# Altium PCB 505153_1_3.PcbDoc
Units mil, origin at the board's own origin, x right, y up, seen from the top; angles counter-clockwise.
Board outline 3550 x 2525 mil, 2 copper layers (Top Layer, Bottom Layer); 26 components, 19 nets, 86 pads, 39 vias.
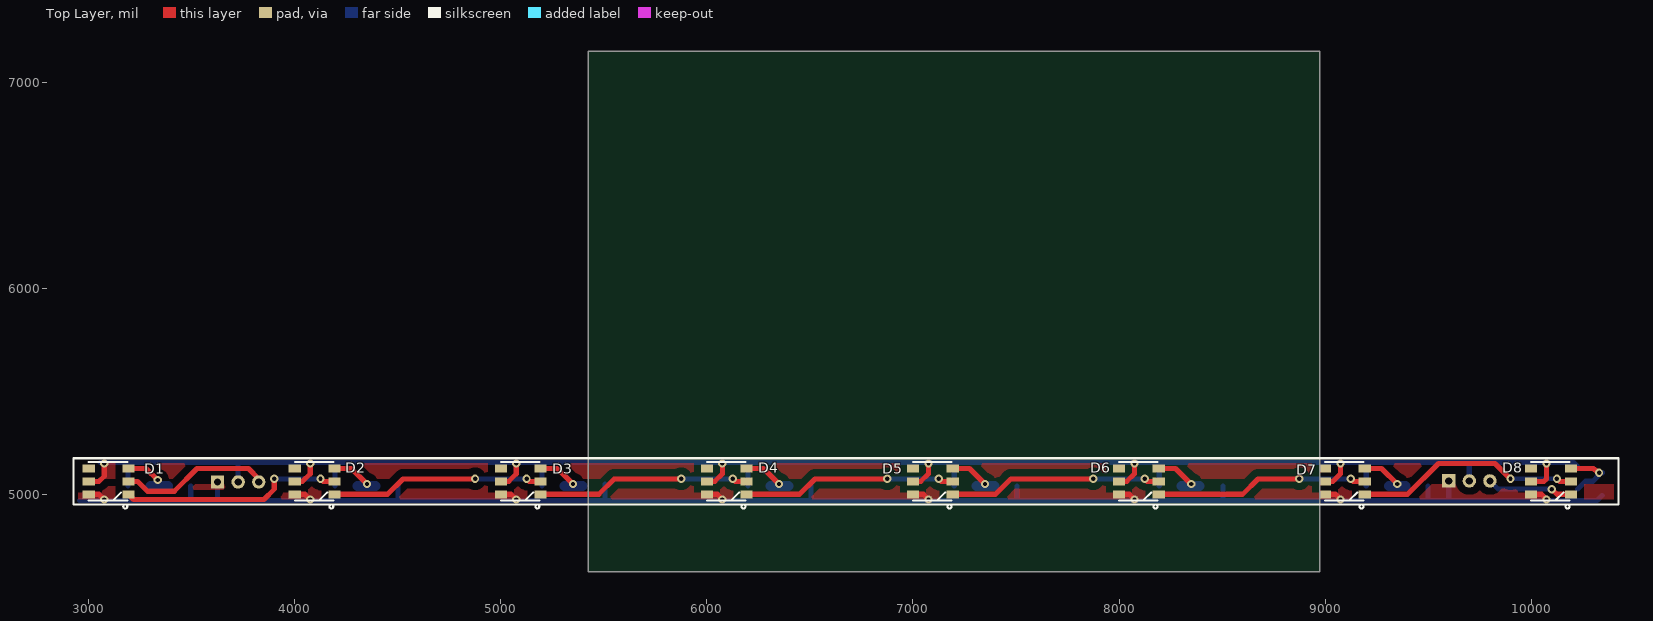
[diagram p0: Top Layer view]
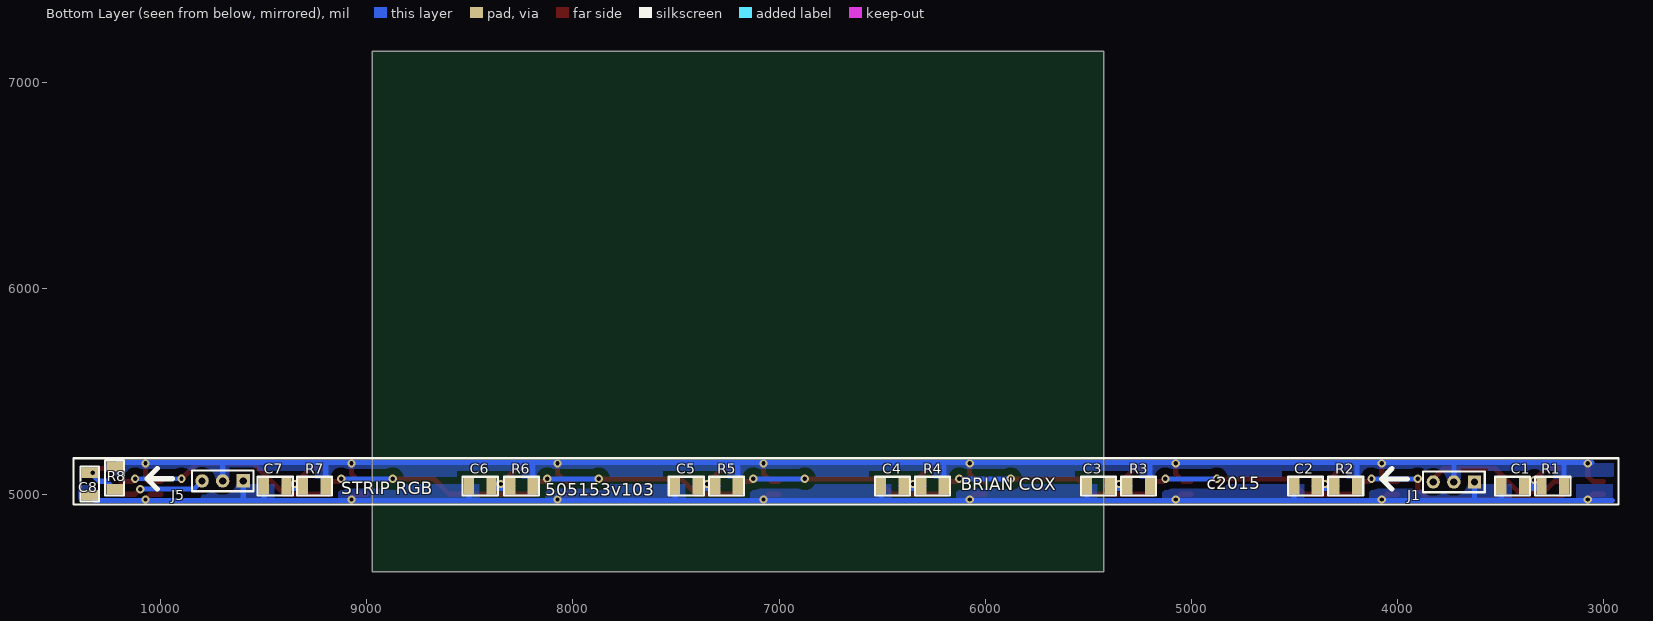
[diagram p1: Bottom Layer view, seen from below]

## Layer stack, top to bottom
Top Layer: signal copper 1.4
Dielectric: core 12.6, FR-4, Dk 4.8
Bottom Layer: signal copper 1.4

## Board outline
5425,4625 8975,4625 8975,7150 5425,7150

## Design rules (kind name [scope] priority, off if disabled: settings)
Clearance LED [(HasFootprint('LED T-1'))] p1: gap=0
Clearance POLYGON [(InPolygon)] p2: gap=35
Clearance JUMPER [(HasFootprint('JUMPER_SMT'))] p3: gap=0
Clearance [All] p4: gap=15
ComponentClearance [All] p1: gap=5 collisioncheckmode=0 verticalgap=10
HoleSize [All] p1: absolutevalues=TRUE maxlimit=126 minlimit=1 maxpercent=80.000 minpercent=20.000
PasteMaskExpansion [All] p1: expansion=-5
PlaneClearance [All] p1: clearance=35
PlaneConnect [All] p1: planeconnectstyle=Relief reliefexpansion=25 reliefentries=4 reliefconductorwidth=25 reliefairgap=25
PolygonConnect [All] p1: connectstyle=Direct reliefconductorwidth=25 reliefentries=4 polygonreliefangle="90 Angle"
RoomDefinition 505153_1_2 [InComponentClass('505153_1_2')] p1: confinementstyle=ConfineIn formatcopy=TRUE lockcomponents=FALSE outline 2150,4150 10700,4150 10700,5650 2150,5650
RoutingVias [All] p1: holewidth=20 width=41 viastyle="Through Hole" minholewidth=20 minwidth=41 maxholewidth=35 maxwidth=65
SMDNeckDown [All] p1 off: percent=75.000
SolderMaskExpansion [All] p1: expansion=4
TestPointUsage [All] p1: valid=0 allowmultiple=FALSE
Testpoint [All] p1: side=15 testpointundercomponent=TRUE minsize=40 maxsize=100 preferedsize=60 minholesize=0 maxholesize=40 preferedholesize=32 testpointgrid=1 style=1023 order=0123456789
Width [All] p1: maxlimit=250 minlimit=5 preferedwidth=25 bottomlayer_prefwidth=50 minimp=50.000000 maximp=50.000000 favimp=50.000000
Width DC [(InNet('DC*'))] p2: maxlimit=100 minlimit=15 preferedwidth=50
Width AC [(InNet('AC1') or InNet('AC2'))] p3: maxlimit=100 minlimit=15 preferedwidth=50
14 further rules are at their usual default settings.

## Components (designator, comment, footprint, x,y, rotation, side; value= is the part's Value field where it differs from the comment)
C1 "CAP_1206" SMT_1206_MOD 3440,5040 r90 bottom
C2 "CAP_1206" SMT_1206_MOD 4445,5040 r90 bottom
C3 "CAP_1206" SMT_1206_MOD 5450,5040 r90 bottom
C4 "CAP_1206" SMT_1206_MOD 6450,5040 r90 bottom
C5 "CAP_1206" SMT_1206_MOD 7450,5040 r90 bottom
C6 "CAP_1206" SMT_1206_MOD 8450,5040 r90 bottom
C7 "CAP_1206" SMT_1206_MOD 9445,5040 r90 bottom
C8 "CAP_1206" SMT_1206_MOD 10345,5050 r0 bottom
D1 "LED_NEOPIXEL" NEOPIXEL 3000,5000 r0 top locked
D2 "LED_NEOPIXEL" NEOPIXEL 4000,5000 r0 top locked
D3 "LED_NEOPIXEL" NEOPIXEL 5000,5000 r0 top locked
D4 "LED_NEOPIXEL" NEOPIXEL 6000,5000 r0 top locked
D5 "LED_NEOPIXEL" NEOPIXEL 7000,5000 r0 top locked
D6 "LED_NEOPIXEL" NEOPIXEL 8000,5000 r0 top locked
D7 "LED_NEOPIXEL" NEOPIXEL 9000,5000 r0 top locked
D8 "LED_NEOPIXEL" NEOPIXEL 10000,5000 r0 top locked
J1 "HEADER, 3-PIN" "HEADER, 3-pin" 3625,5060 r270 bottom
J5 "HEADER, 3-PIN" "HEADER, 3-pin" 9600,5065 r270 bottom
R1 "RES_1206" SMT_1206_MOD 3245,5040 r270 bottom
R2 "RES_1206" SMT_1206_MOD 4250,5040 r270 bottom
R3 "RES_1206" SMT_1206_MOD 5255,5040 r270 bottom
R4 "RES_1206" SMT_1206_MOD 6255,5040 r270 bottom
R5 "RES_1206" SMT_1206_MOD 7255,5040 r270 bottom
R6 "RES_1206" SMT_1206_MOD 8250,5040 r270 bottom
R7 "RES_1206" SMT_1206_MOD 9255,5040 r270 bottom
R8 "RES_1206" SMT_1206_MOD 10225,5080 r180 bottom

## Footprints (in the part's own frame and the unit in brackets; to place one, negate y for a bottom-side part, rotate by r counter-clockwise, add the part's x,y. Pads: shape width x height; smd on the part's side, far side on the other; paste and mask are expansions set on the pad)
"HEADER, 3-pin" [mil]
  rect 65x65 hole 35: 1(0,0)
  round 65 hole 35: 2(0,-100) 3(0,-200)
  silkscreen extent -50,-250 50,50
NEOPIXEL [mm] "Adafruit Neopixel"
  rect 1.5x1 smd: 1(4.897,0) 2(4.897,1.6) 3(4.897,3.2) 4(0,3.2) 5(0,1.6) 6(0,0)
  silkscreen extent 0,-1.75 4.75,4
SMT_1206_MOD [mil]
  rect 80x50 smd: 1(0,55) 2(0,-55)
  silkscreen extent -45,-85 45,85

## Part data
C1 C2 C3 C4 C5 C6 C7 C8: "CAP"
D1 D2 D3 D4 D5 D6 D7 D8: "RGB NEOPIXEL"
J1 J5: library part "HEADER, 3-PIN_1", "Header, 3-Pin"
R1 R2 R3 R4 R5 R6 R7 R8: "RES"

## Via types
v1: diameter 40, hole 21, Top Layer to Bottom Layer, 39 vias

## Nets (pads, with @x,y where several pads share a name; then routed paths per layer and width w, separated by ;. In a path a pad name is that pad's centre, name@x,y a point inside that pad or via, vN(x,y) a via of type N, cw(c..) or ccw(c..) an arc to the next point about the centre after c; other vN are vias at no path point)
DI: D1.2 J1.3 | length 733.4
  Top Layer w25: D1.2 3237.01,5062.99 3285,5015 3415,5015 3525,5125 3775,5125 3825,5075 J1.3
DO: D8.1 J5.3 | length 419.7
  Top Layer w25: v1(10100,5025) 10125,5000 D8.1
  Bottom Layer w25: J5.3 9840,5025 v1(10100,5025)
GND: C1.1 C2.1 C3.1 C4.1 C5.1 C6.1 C7.1 C8.1 D1.6 D2.6 D3.6 D4.6 D5.6 D6.6 D7.6 D8.6 J1.1 J5.1 | length 8774.4
  Top Layer w25: D1.6 3050,5000 v1(3075,4975) ; D2.6 4050,5000 v1(4075,4975) ; D3.6 5050,5000 v1(5075,4975) ; D4.6 6050,5000 v1(6075,4975) ; D5.6 7050,5000 v1(7075,4975) ; D6.6 8050,5000 v1(8075,4975) ; D7.6 9050,5000 v1(9075,4975) ; D8.6 10050,5000 v1(10075,4975)
  Bottom Layer w25: 2955,4970 10320,4970 C8.1 ; C1.1 3495,4975 3500,4970 ; 3625,4970 J1.1 ; 4500,4970 C2.1 ; 5505,4970 C3.1@5505,5050 ; 6505,4970 C4.1 ; 7500,4970 7505,4975 C5.1 ; 8500,4970 8505,4975 C6.1 ; 9500,4970 C7.1 ; 9600,4970 J5.1
NetC1_2: C1.2 D1.3 R1.2 | length 283.5
  Top Layer w25: D1.3 3278.04,5125.98 v1(3334.87,5069.16)
  Bottom Layer w25: v1(3334.87,5069.16) 3339.39,5060.45 3350,5040
  Bottom Layer w50: R1.2 C1.2
NetC2_2: C2.2 D2.3 R2.2 | length 368.7
  Top Layer w25: D2.3 4274.02,5125.98 v1(4350,5050)
  Bottom Layer w25: v1@4350,5040 v1(4350,5050)
  Bottom Layer w50: R2.2 C2.2 R2.2
NetC3_2: C3.2 D3.3 R3.2 | length 358.7
  Top Layer w25: D3.3 5274.02,5125.98 v1(5350,5050)
  Bottom Layer w25: R3.2@5310,5050 C3.2@5395,5050
  Bottom Layer w50: R3.2 C3.2
NetC4_2: C4.2 D4.3 R4.2 | length 368.7
  Top Layer w25: D4.3 6274.02,5125.98 v1(6350,5050)
  Bottom Layer w25: R4.2 C4.2 ; v1@6350,5040 v1(6350,5050)
  Bottom Layer w50: R4.2 C4.2
NetC5_2: C5.2 D5.3 R5.2 | length 368.7
  Top Layer w25: D5.3 7274.02,5125.98 v1(7350,5050)
  Bottom Layer w25: R5.2 C5.2 ; v1@7350,5040 v1(7350,5050)
  Bottom Layer w50: R5.2 C5.2
NetC6_2: C6.2 D6.3 R6.2 | length 373.7
  Top Layer w25: D6.3 8274.02,5125.98 v1(8350,5050)
  Bottom Layer w25: R6.2 C6.2 ; v1@8350,5040 v1(8350,5050)
  Bottom Layer w50: R6.2 C6.2@8390,5040
NetC7_2: C7.2 D7.3 R7.2 | length 358.7
  Top Layer w25: D7.3 9274.02,5125.98 v1(9350,5050)
  Bottom Layer w25: R7.2 C7.2 ; v1@9350,5040 v1(9350,5050)
  Bottom Layer w50: R7.2 C7.2
NetC8_2: C8.2 D8.3 R8.2 | length 303.7
  Top Layer w25: D8.3 10299.02,5125.98 v1(10330,5105)
  Bottom Layer w25: R8.2 10263.24,5063.24 10300,5063.24 10330,5093.24 v1(10330,5105) C8.2
NetD1_1: D1.1 D2.2 | length 1086
  Top Layer w25: D1.1 3217.8,4975 3850,4975 3900,5025 v1(3900,5075) ; v1(4125,5075) 4137.01,5062.99 D2.2
  Bottom Layer w25: v1(3900,5075) v1(4125,5075)
NetD2_1: D2.1 D3.2 | length 1036
  Top Layer w25: D2.1 4450,5000 4525,5075 v1(4875,5075) ; v1(5125,5075) 5137.01,5062.99 D3.2
  Bottom Layer w25: v1(4875,5075) v1(5125,5075)
NetD3_1: D3.1 D4.2 | length 1036
  Top Layer w25: D3.1 5475,5000 5550,5075 v1(5875,5075) ; v1(6125,5075) 6137.01,5062.99 D4.2
  Bottom Layer w25: v1(5875,5075) v1(6125,5075)
NetD4_1: D4.1 D5.2 | length 1036
  Top Layer w25: D4.1 6450,5000 6525,5075 v1(6875,5075) ; v1(7125,5075) 7137.01,5062.99 D5.2
  Bottom Layer w25: v1(6875,5075) v1(7125,5075)
NetD5_1: D5.1 D6.2 | length 1036
  Top Layer w25: D5.1 7400,5000 7475,5075 v1(7875,5075) ; v1(8125,5075) 8137.01,5062.99 D6.2
  Bottom Layer w25: v1(7875,5075) v1(8125,5075)
NetD6_1: D6.1 D7.2 | length 1036
  Top Layer w25: D6.1 8600,5000 8675,5075 v1(8875,5075) ; v1(9125,5075) 9137.01,5062.99 D7.2
  Bottom Layer w25: v1(8875,5075) v1(9125,5075)
NetD7_1: D7.1 D8.2 | length 1098.6
  Top Layer w25: D7.1 9400,5000 9550,5150 9825,5150 v1(9900,5075) ; v1(10125,5075.98) 10137.99,5062.99 D8.2
  Bottom Layer w25: v1(9900,5075) v1(10125,5075.98)
VDD: D1.5 D2.5 D3.5 D4.5 D5.5 D6.5 D7.5 D8.5 J1.2 J5.2 R1.1 R2.1 R3.1 R4.1 R5.1 R6.1 R7.1 R8.1 | length 9318.8
  Top Layer w25: D1.5 3050,5062.99 3075,5087.99 v1(3075,5150) ; D2.5 4037.99,5062.99 4075,5100 v1(4075,5150) ; D3.5 5037.99,5062.99 5075,5100 v1(5075,5150) ; D4.5 6037.99,5062.99 6075,5100 v1(6075,5150) ; D5.5 7037.99,5062.99 7075,5100 v1(7075,5150) ; D6.5 8037.99,5062.99 8075,5100 v1(8075,5150) ; D7.5 9037.99,5062.99 9075,5100 v1(9075,5150) ; D8.5 10062.99,5062.99 10075,5075 v1(10075,5150)
  Bottom Layer w25: 3055,5155 10205,5155 R8.1 ; R1.1 3190,5145 3200,5155 ; J1.2 3725,5155 ; R2.1 4195,5155 ; R3.1 5200,5155 ; R4.1 6200,5155 ; R5.1 7200,5155 ; R6.1 8195,5150 8200,5155 ; R7.1 9200,5155 ; J5.2 9700,5155
pads on no net: D1.4 D2.4 D3.4 D4.4 D5.4 D6.4 D7.4 D8.4

## Polygon pours and split planes (outlines as drawn)
GND on Top Layer (solid): 2950,4975 10400,4975 10400,5050 2950,5050
VDD on Top Layer (solid): 2950,5150 2950,5075 10400,5075 10400,5150
VDD on Bottom Layer (solid): 2950,5150 2950,5075 10400,5075 10400,5150
GND on Bottom Layer (solid): 10400,5050 10400,4975 2955,4975 2955,5050

## Silkscreen, mask and mechanical layers (free items; w line width, h text height)
Top Overlay:
  lines w10: 2925,4950 10425,4950 10425,5175 2925,5175 2925,4950
Bottom Overlay:
  lines w10: 2925,4950 2925,5175 10425,5175 10425,4950 2925,4950
  lines w25: 3950,5075 4075,5075 ; 4025,5025 4075,5075 ; 4025,5125 4075,5075 ; 9942.77,5075.19 10067.77,5075.19 ; 10017.77,5025.19 10067.77,5075.19 ; 10017.77,5125.19 10067.77,5075.19
  text "c2015" at 4925,5025 h60
  text "BRIAN COX" at 6117.82,5020.47 h60
  text "STRIP RGB" at 9125,5000 h60
  text "505153v103" at 8135,4992.88 h60
Mechanical 3:
  drawing of 367 lines, arcs and shapes, not listed
Mechanical 4:
  text ".Pcb_File_Name" at 1200,3525 h100
  text ".Print_Date" at 1200,3275 h100
Mechanical 5:
  lines w1: 2925,4950 2925,5175 10425,5175 10425,4950 2925,4950
Mechanical 9:
  text "-SB" at 2000,8775 h150
  text "3. All marking on PCB must be white silk screen." at 1200,1775 h100
  text "BOTTOM SILKSCREEN" at 9550,1350 h80
  text "-SB" at 11200,1050 h100
Mechanical 10:
  text "-T" at 2000,8775 h150
  text "3. PCB is double sided." at 1200,1775 h100
  text "4. Holes are plated through." at 1200,1625 h100
  text "5. All bare copper on PCB must be tin plated." at 1210,1475 h100
  text "TOP COPPER" at 9575,1350 h80
  text "-T" at 11200,1050 h100
Mechanical 11:
  text "-B" at 2000,8775 h150
  text "3. PCB is double sided." at 1200,1775 h100
  text "4. Holes are plated through." at 1200,1625 h100
  text "5. All bare copper on PCB must be tin plated." at 1210,1475 h100
  text "BOTTOM COPPER" at 9600,1350 h80
  text "-B" at 11200,1050 h100
Mechanical 12:
  text "-MT" at 2000,8775 h150
  text "3. Top side of PCB must be covered with green solder mask." at 1200,1775 h100
  text "TOP SOLDERMASK" at 9550,1350 h80
  text "-MT" at 11200,1050 h100
Mechanical 13:
  text "-MB" at 2000,8775 h150
  text "3. Bottom side of PCB must be covered with green solder mask." at 1200,1775 h100
  text "BOTTOM SOLDERMASK" at 9550,1350 h80
  text "-MB" at 11200,1050 h100
Mechanical 14:
  text "-ST" at 2000,8775 h150
  text "3. All marking on PCB must be white silk screen." at 1200,1775 h100
  text "TOP SILKSCREEN" at 9550,1350 h80
  text "-ST" at 11200,1050 h100
Mechanical 15:
  text "-D" at 2000,8775 h150
  text "MECHANICAL" at 9550,1350 h80
  text "-D" at 11200,1050 h100
Mechanical 16:
  lines w5: 2500,8700 2500,9000
  lines w10: 7887.71,1275 11500,1275 ; 7887.71,1550 11500,1550 ; 7887.71,1825 11500,1825 ; 7887.71,2100 11487.71,2100 ; 7887.71,8250 11500,8250 ; 7887.71,8400 11500,8400 ; 7887.71,8550 11500,8550 ; 7887.71,8700 11500,8700 ; 7887.71,8850 11500,8850 ; 8137.71,8250 8137.71,9000 ; 8512.71,8250 8512.71,9000 ; 8762.71,8250 8762.71,9000 ; 8787.71,1000 8787.71,1275 ; 8787.71,1550 8787.71,2100 ; 9687.71,1550 9687.71,2100 ; 10587.71,1000 10587.71,1275 ; 10587.71,1825 10587.71,2100 ; 1000,1000 1000,1025 1000,9000 11500,9000 11500,1000 1000,1000
  lines w16: 1000,8700 6292.09,8700 6292.09,9000 ; 2500,8700 2500,9000 ; 7887.71,1000 7887.71,2525 11487.71,2525 ; 7887.71,2100 11500,2100 ; 7887.71,8250 7887.71,9000
  text "REV." at 7925,8900 h50
  text "DATE" at 8233.55,8900 h50
  text "BY" at 8596.05,8900 h50
  text "DESCRIPTION" at 9818.86,8900 h50
  text "PROPRIETARY INFORMATION. DO NOT REPRODUCE, COPY," at 2575,8890 h50
  text "505XXX" at 1125,8775 h150
  text "OR USE WITHOUT EXPRESS WRITTEN PERMISSION." at 2575,8775 h50
  text "PRELIMINARY" at 9750,8750 h60
  text "1" at 7992.71,8745 h60
  text "XXXXXX" at 8155,8745 h60
  text "BC" at 8577.71,8745 h60
  text "-" at 8300,8600 h60
  text "-" at 7992.71,8595 h60
  text "-" at 8617.71,8595 h60
  text "-" at 10111.36,8595 h60
  text "-" at 7992.71,8445 h60
  text "-" at 8300,8445 h60
  text "-" at 8617.71,8445 h60
  text "-" at 10111.36,8445 h60
  text "-" at 7992.71,8295 h60
  text "-" at 8300,8295 h60
  text "-" at 8617.71,8295 h60
  text "-" at 10111.36,8295 h60
  text "space-eight.com" at 8900,2325 h100
  text "REMARKS:" at 1200,2225 h100
  text "343 NW 84TH ST, SEATTLE, WA 98117, PH: 323 791-6991" at 8375,2175 h50
  text "1. Dimensions are in inches." at 1200,2075 h100
  text "DATE:" at 7912.71,2025 h50
  text "DRAWN BY:" at 8812.71,2025 h50
  text "CHECKED BY:" at 9712.71,2025 h50
  text "APPROVED BY:" at 10612.71,2025 h50
  text "2. Board size is X in x X in." at 1200,1925 h100
  text "XXXXXX" at 8100,1885 h80
  text "BC" at 9200,1885 h80
  text "BC" at 10100,1885 h80
  text "LAST REV. DATE:" at 7912.71,1750 h50
  text "REV. LEVEL:" at 8812.71,1750 h50
  text "MATERIAL:" at 9712.71,1750 h50
  text "FR4, NATURAL" at 10200,1725 h50
  text "-" at 8200,1600 h80
  text "1" at 9200,1600 h80
  text "THICKNESS:" at 9712.71,1600 h50
  text ".062in, 1oz. Cu" at 10200,1600 h50
  text "TITLE:" at 7912.71,1475 h50
  text "PCB FOR SP11XXXX" at 8200,1350 h80
  text "SCALE:" at 7912.71,1200 h50
  text "TOL:" at 8812.71,1200 h50
  text ".XX(.X)" at 9200.21,1200 h50
  text ".XXX(.XX)" at 9775.21,1200 h50
  text "ANGLE:" at 10275,1200 h50
  text "DRAWING NUMBER:" at 10625,1200 h50
  text "1:1" at 8311.05,1060 h80
  text ".010(.25)" at 9000,1060 h80
  text ".005(.13)" at 9700,1060 h80
  text "-" at 10423.55,1060 h80
  text "505XXX" at 10625,1050 h100
Drill Drawing:
  text ".Legend" at 1250,2925 h100
  text "Drill Legend" at 1225,2600 h100